# Altium PCB PCB1.PcbDoc
Units mil, origin at the board's own origin, x right, y up, seen from the top; angles counter-clockwise.
Board outline 6000 x 4000 mil, 2 copper layers (Top Layer, Bottom Layer); 88 components, 63 nets, 285 pads, 2 vias.
Unrouted connection lines stored in the file: 200.
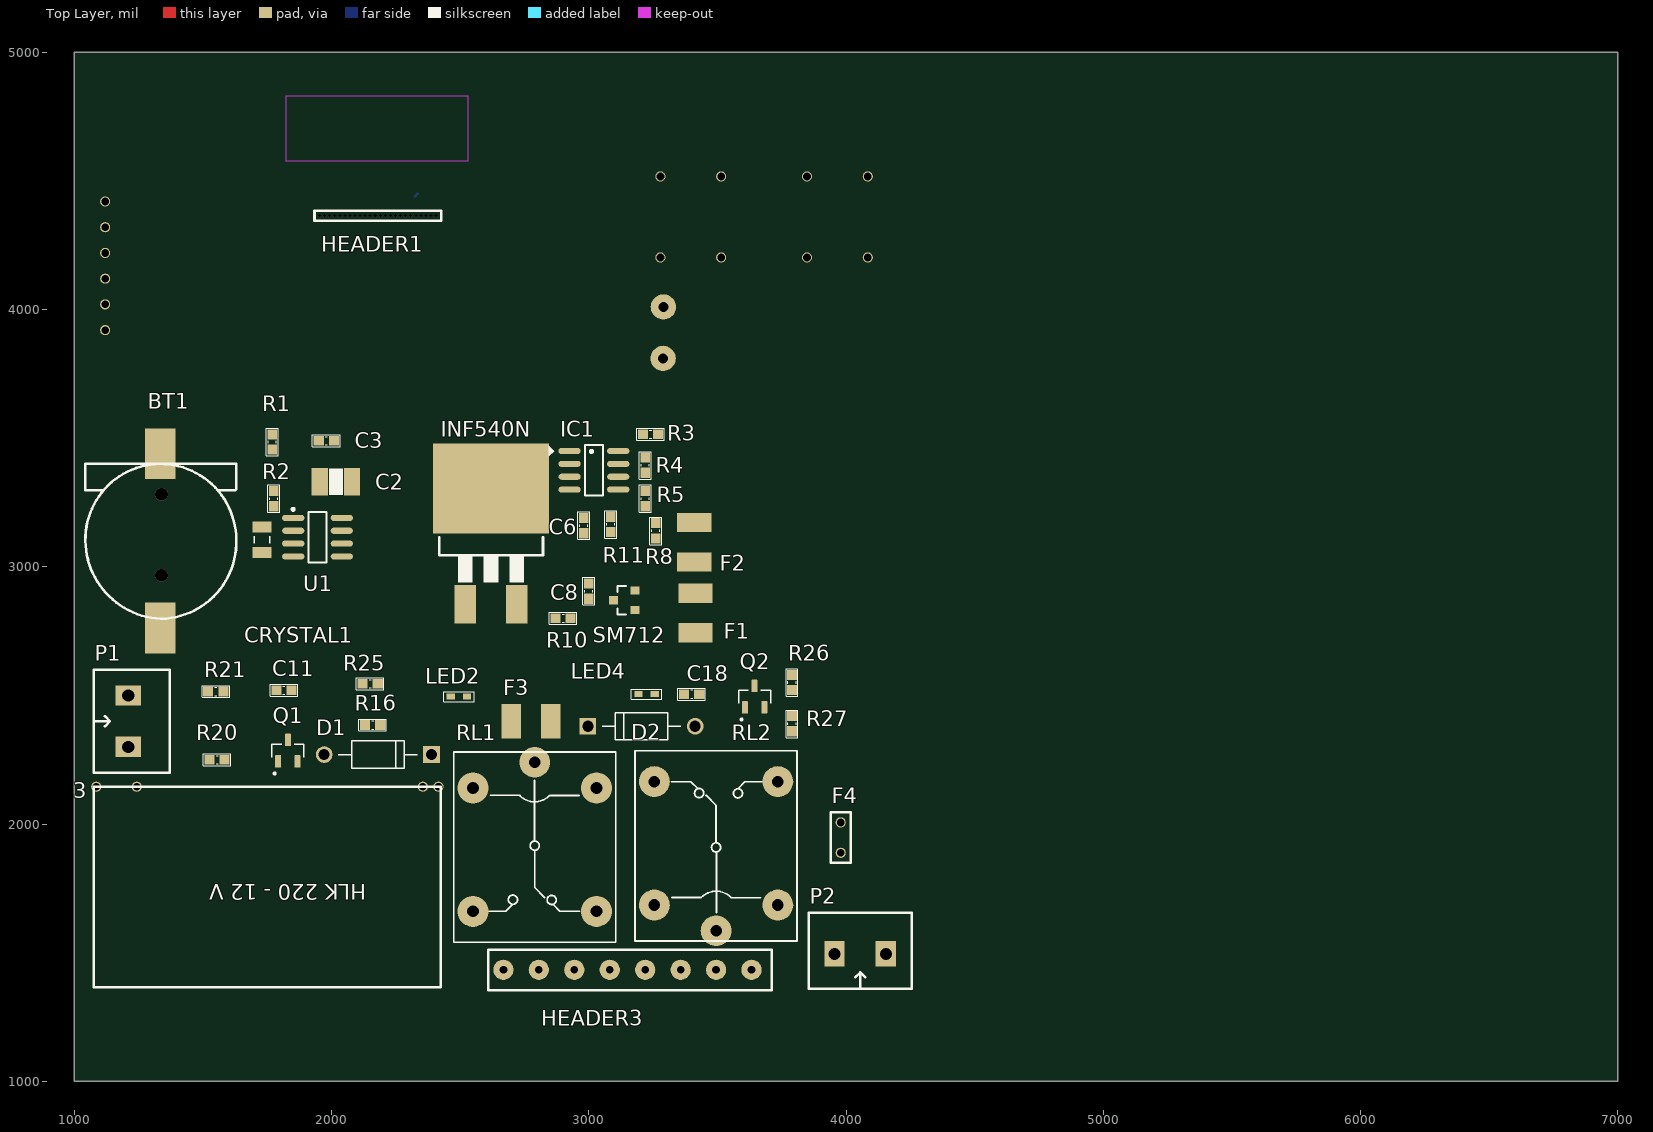
[diagram p0: Top Layer view]
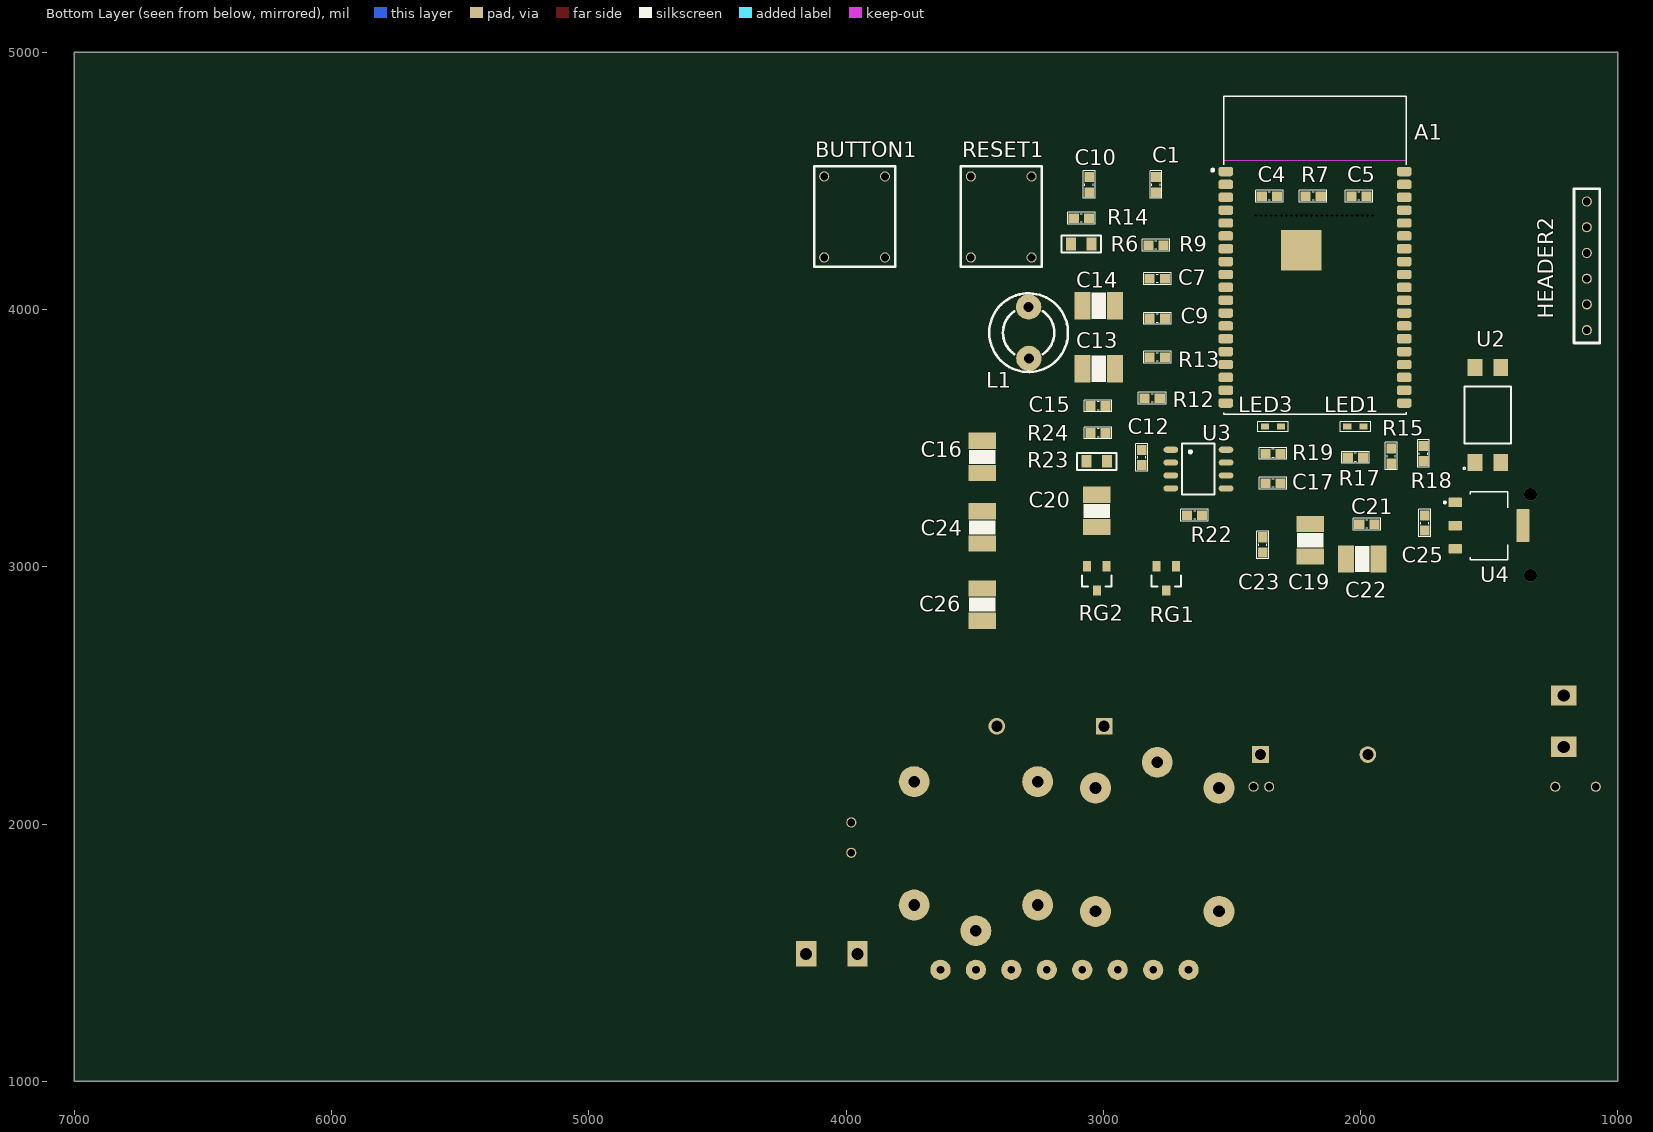
[diagram p1: Bottom Layer view, seen from below]

## Layer stack, top to bottom
Top Solder: solder mask 0.4, Solder Resist, Dk 3.5
Top Layer: signal copper 1.4
Dielectric 1: dielectric 12.6, FR-4, Dk 4.8
Bottom Layer: signal copper 1.4
Bottom Solder: solder mask 0.4, Solder Resist, Dk 3.5

## Board outline
1000,1000 7000,1000 7000,5000 1000,5000

## Design rules (kind name [scope] priority, off if disabled: settings)
Clearance [All] p1: gap=15
PolygonConnect [All] p1: connectstyle=Relief reliefconductorwidth=10 reliefentries=4 polygonreliefangle="90 Angle" airgapwidth=10
RoomDefinition Sheet1 [InComponentClass('Sheet1')] p1: confinementstyle=ConfineIn formatcopy=TRUE lockcomponents=FALSE outline 0,0 2000,0 2000,1000 0,1000
RoutingVias [All] p1: holewidth=28 width=50 viastyle="Through Hole" minholewidth=28 minwidth=50 maxholewidth=28 maxwidth=50
SolderMaskExpansion [All] p1: expansion=4
Width [All] p1: maxlimit=10 minlimit=10 preferedwidth=10
30 further rules are at their usual default settings.

## Components (designator, comment, footprint, x,y, rotation, side; value= is the part's Value field where it differs from the comment)
3 "HLK-220V-12V" "HLK 220-12" 475,2345 r90 top
A1 "ESP32-WROVER-I" XCVR_ESP32-WROVER-I 2176.81,4211.06 r180 bottom
BT1 "MH004292" "DE PINCR1220" 1630,3400 r180 top
BUTTON1 "SW-2P-S" BUTTON_4_PIN 4065,4360 r270 bottom
C1 "0.1uF" "Tu 0603" 2795,4485 r90 bottom
C2 "10uF" C1210 2025,3330 r0 top
C3 "100nF" "Tu 0603" 1980,3490 r180 top
C4 "15pF" "Tu 0603" 2354,4440 r0 bottom
C5 "0.1uF" "Tu 0603" 2006,4440 r180 bottom
C6 "100nF" "Tu 0603" 2980,3160 r270 top
C7 "0.1uF" "Tu 0603" 2790,4120 r180 bottom
C8 "1nF" "Tu 0603" 3000,2905 r90 top
C9 "0.1uF" "Tu 0603" 2790,3965 r180 bottom
C10 "0.1uF" "Tu 0603" 3055,4485 r90 bottom
C11 "100nF" "Tu 0603" 1815,2520 r0 top
C12 "100nF" "Tu 0603" 2850,3425 r270 bottom
C13 "10uF" C1210 3025,3770 r0 bottom
C14 "10uF" C1210 3025,4015 r0 bottom
C15 "100nF" "Tu 0603" 3020,3625 r0 bottom
C16 "47uF" C1210 3470,3435 r90 bottom
C17 "100nF" "Tu 0603" 2340,3325 r180 bottom
C18 "100nF" "Tu 0603" 3400,2505 r180 top
C19 "10uF" C1210 2195,3095 r270 bottom
C20 "10uF" C1210 3025,3225 r90 bottom
C21 "0.1uF" "Tu 0603" 1975,3165 r180 bottom
C22 "10uF" C1210 1985,3030 r180 bottom
C23 "100nF" "Tu 0603" 2380,3085 r90 bottom
C24 "10uF" C1210 3470,3145 r270 bottom
C25 "0.1uF" "Tu 0603" 1750,3170 r90 bottom
C26 "10uF" C1210 3470,2845 r270 bottom
CRYSTAL1 "32.768kHZ" XTAL_ABS07-32.768KHZ-T 1730,3105 r90 top
D1 "1N4007" DIOAD1060W80L520D270 2180,2270 r180 top
D2 "1N4007" DIOAD1060W80L520D270 3205,2380 r0 top
F1 "PTC 750 mA" 1812 3415,2820 r270 top
F2 "PTC 750 mA" 1812 3410,3095 r90 top
F3 "PTC 1A" 1812 2775,2400 r0 top
F4 "10A/250V" FUSE_10A 3940,1770 r270 top
HEADER1 "OV2640_CAMERA_CONNECTION" OV2640_0.5mm 2170,4660 r90 top
HEADER2 "CONG_NAP" CONG_NAP 1320,4120 r0 bottom
HEADER3 "CAT6" CAT6_3.5mm 2865,1630 r90 top
IC1 "MAX485" SO-8 3020,3375 r0 top
INF540N "IRF540N" D2PACK 2620,3205 r0 top (schematic designator 1)
L1 "15uH/3A" "CUON CAM 200mil" 3290,3910 r270 bottom
LED1 "" "LED_SMD_0603 - duplicate1" 2020,3545 r180 bottom
LED2 "" "LED_SMD_0603 - duplicate1" 2495,2495 r0 top
LED3 "" "LED_SMD_0603 - duplicate1" 2340,3545 r180 bottom
LED4 "" "LED_SMD_0603 - duplicate1" 3225,2505 r0 top
P1 "INPUT_220VAC" "Medium - Header 2" 1210,2400 r90 top
P2 "OUTPUT_220VAC" "Medium - Header 2" 4055,1495 r180 top
Q1 "BSS138" SOT95P240X111-3N 1830,2285 r90 top
Q2 "BSS138" SOT95P240X111-3N 3645,2495 r90 top
R1 "RES_08" "TRO SMD 0603" 1770,3485 r270 top
R2 "RES_08" "TRO SMD 0603" 1775,3265 r270 top
R3 "RES_08" "TRO SMD 0603" 3240,3515 r180 top
R4 "RES_08" "TRO SMD 0603" 3220,3395 r270 top
R5 "RES_08" "TRO SMD 0603" 3220,3265 r90 top
R6 "RES_08" "DIEN TRO 0805" 3085,4255 r0 bottom
R7 "RES_08" "TRO SMD 0603" 2184,4440 r0 bottom
R8 "RES_08" "TRO SMD 0603" 3260,3140 r270 top
R9 "RES_08" "TRO SMD 0603" 2795,4250 r0 bottom
R10 "RES_08" "TRO SMD 0603" 2900,2800 r0 top
R11 "RES_08" "TRO SMD 0603" 3085,3165 r270 top
R12 "RES_08" "TRO SMD 0603" 2810,3655 r180 bottom
R13 "RES_08" "TRO SMD 0603" 2790,3815 r180 bottom
R14 "RES_08" "TRO SMD 0603" 3085,4355 r180 bottom
R15 "RES_08" "TRO SMD 0603" 1880,3430 r90 bottom
R16 "RES_08" "TRO SMD 0603" 2160,2385 r180 top
R17 "RES_08" "TRO SMD 0603" 2020,3425 r180 bottom
R18 "RES_08" "TRO SMD 0603" 1755,3440 r270 bottom
R19 "RES_08" "TRO SMD 0603" 2340,3440 r180 bottom
R20 "RES_08" "TRO SMD 0603" 1555,2250 r180 top
R21 "RES_08" "TRO SMD 0603" 1550,2515 r0 top
R22 "RES_08" "TRO SMD 0603" 2645,3200 r0 bottom
R23 "RES_08" "DIEN TRO 0805" 3025,3410 r180 bottom
R24 "RES_08" "TRO SMD 0603" 3020,3520 r180 bottom
R25 "RES_08" "TRO SMD 0603" 2150,2545 r180 top
R26 "RES_08" "TRO SMD 0603" 3790,2550 r270 top
R27 "RES_08" "TRO SMD 0603" 3790,2390 r270 top
RESET1 "SW-2P-S" BUTTON_4_PIN 3495,4360 r270 bottom
RG1 "Reg_Torex_XC6206P332MR_eec" Torex_https--www.torexsemi.com-file-SOT-23-SOT-23-pkg.pdf_0 2755,2955 r270 bottom
RG2 "Reg_Torex_XC6206P332MR_eec" Torex_https--www.torexsemi.com-file-SOT-23-SOT-23-pkg.pdf_0 3025,2955 r270 bottom
RL1 "Relay 1A/12V" RL_SPDT_10A 2790,2240 r270 top
RL2 "Relay 1A/12V" RL_SPDT_10A 3495,1585 r90 top
SM712 "SM712" SOT23-3 3140,2870 r90 top (schematic designator 2)
U1 "DS1307" SOIC8 1851.02,3190 r270 top
U2 "OPTO" SOIC254P1016X390-4N 1505,3590 r90 bottom
U3 "FR9888" FR9888_SMD 2630,3380 r180 bottom
U4 "AMS1117-3.3" SOT229P700X180-4N 1500,3160 r270 bottom

## Footprints (in the part's own frame and the unit in brackets; to place one, negate y for a bottom-side part, rotate by r counter-clockwise, add the part's x,y. Pads: shape width x height; smd on the part's side, far side on the other; paste and mask are expansions set on the pad)
1812 [mm]
  rect 1.9x3.4 smd: 1(-1.95,0) 2(1.95,0)
BUTTON_4_PIN [mm] "BUTTON_4_PIN"
  round 1 hole 0.762: 1(-4,5.5) 2(4,5.5) ""(-4,-0.5) ""(4,-0.5)
  silkscreen extent -5,-1.5 4.9,6.5
C1210 [mm] "Chip Capacitor; Body 3.2 x 2.5 mm (LxW typ)"
  rect 1.6x2.7 smd: 1(1.4,0) 2(-1.8,0)
  silkscreen extent -0.9,-1.3 0.5,1.3, body extent -2.3,-1.35 1.9,1.35
CAT6_3.5mm [mm]
  round 2 hole 0.762: 1(-5,5) 2(-5,1.5) 3(-5,-2) 4(-5,-5.5) 5(-5,-9) 6(-5,-12.5) 7(-5,-16) 8(-5,-19.5)
  silkscreen extent -7,-21.5 -3,6.5
CONG_NAP [mm] "CONG_NAP_6_PIN"
  round 1 hole 0.762: 1(-5.08,5.08) 2(-5.08,2.54) 3(-5.08,0) 4(-5.08,-2.54) 5(-5.08,-5.08) 6(-5.08,-7.62)
  silkscreen extent -6.35,-8.89 -3.81,6.35
"CUON CAM 200mil" [mm]
  round 2.5 hole 1: 1(-2.54,0) 2(2.54,0.025)
  silkscreen extent -3.89,-3.89 3.89,3.88
D2PACK [mil]
  rect 82x150 smd: 1(-100,-350) 3(100,-350)
  rect 450x350 smd: 2(0,100)
  silkscreen extent -202,-266 202,-91
"DE PINCR1220" [mm]
  rect 3x5 smd: 1(7.5,-1) 2(7.5,16.2)
  silkscreen extent 0,0 14.9,15.3, body extent 0.04,-2.82 14.79,15.98, height 4.76
"DIEN TRO 0805" [mil] "Chip Resistor; Body 2.0 x 1.3 mm (LxW typ)"
  rect 39.37x50 smd: 1(-40,0) 2(40,0)
  silkscreen extent -77,-33 77,33, body extent -39,-25 39,25, height 31
DIOAD1060W80L520D270 [mm]
  round 1.65 hole 1.1: A(5.3,0)
  rect 1.65x1.65 hole 1.1: C(-5.3,0)
  silkscreen extent -3.9,-1.35 3.9,1.35
FR9888_SMD [mm] "FR9888_SMD_SOP8"
  oval 1.45x0.6 smd: 1(-2.725,1.905) 2(-2.725,0.635) 3(-2.725,-0.635) 4(-2.725,-1.905) 5(2.725,-1.905) 6(2.725,-0.635) 7(2.725,0.635) 8(2.725,1.905)
  silkscreen extent -1.6,-2.5 1.6,2.5, body extent -2,-2.5 2,2.5, height 1.7
FUSE_10A [mm] "FUSE_1A"
  round 1 hole 0.762: 1(-6,1) 2(-3,1)
  silkscreen extent -7,0 -2,2
"HLK 220-12" [mm] "HLK 220 - 12V Footprint"
  round 1 hole 0.762: 1(-5.08,-15.5) 2(-5.08,-19.5) 3(-5.08,-49.29) 4(-5.08,-47.752)
  silkscreen extent -24.89,-49.53 -5.08,-15.24
"LED_SMD_0603 - duplicate1" [mm] "LED_SMD_0603"
  rect 0.8x0.6 smd: 1(-0.8,0) 2(0.8,0)
  silkscreen extent -1.5,-0.5 1.5,0.5
"Medium - Header 2" [mm]
  rect 2x2.5 hole 1.2: 1(-2.54,0) 2(2.54,0)
  silkscreen extent -5.08,-4.08 5.08,3.43, body extent -5,-4.07 5,3.43, height 10
OV2640_0.5mm [mm] "camera 0v2640 0.5mm"
  oval 0.3x0 hole 0.3: 1(-7.5,5.5) 2(-7.5,5) 3(-7.5,4.5) 4(-7.5,4) 5(-7.5,3.5) 6(-7.5,3) 7(-7.5,2.5) 8(-7.5,2) 9(-7.5,1.5) 10(-7.5,1) 11(-7.5,0.5) 12(-7.5,0) 13(-7.5,-0.5) 14(-7.5,-1) 15(-7.5,-1.5) 16(-7.5,-2) 17(-7.5,-2.5) 18(-7.5,-3) 19(-7.5,-3.5) 20(-7.5,-4) 21(-7.5,-4.5) 22(-7.5,-5) 23(-7.5,-5.5) 24(-7.5,-6)
  silkscreen extent -8,-6.5 -7,6
RL_SPDT_10A [mil] "Relay SPDT, 5 pin, 10A,W 650mil, L 800mil, H 800mil"
  round 120 hole 45: 1(0,0) 2(580,240) 3(580,-240) 4(100,-240) 5(100,240)
  silkscreen extent -40,-315 700,315, body extent -46,-304 706,306, height 602
SO-8 [mm] "8-Pin Small Outline Integrated Circuit 1.27 mm Pitch, IPC Medium Density"
  oval 2.2x0.6 smd: 1(-2.4,1.905) 2(-2.4,0.635) 3(-2.4,-0.635) 4(-2.4,-1.905) 5(2.4,-1.905) 6(2.4,-0.635) 7(2.4,0.635) 8(2.4,1.905)
  silkscreen extent -4.44,-2.5 0.9,2.5, body extent -2.93,-2.51 3.08,2.49, height 1.75
SOIC8 [mm] "SOIC, 8-Leads, Body 4.9x3.9mm, Pitch 1.27mm, IPC Medium Density"
  oval 0.6x2.2 smd: 1(0,0) 2(1.27,0) 3(2.54,0) 4(3.81,0) 5(3.81,4.8) 6(2.54,4.8) 7(1.27,4.8) 8(0,4.8)
  silkscreen extent -0.97,-0.12 4.41,3.3, body extent -0.55,0.45 4.36,4.35, height 1.75
SOIC254P1016X390-4N [mm]
  rect 1.7x1.45 smd: 1(-4.7,1.27) 2(-4.7,-1.27) 3(4.7,-1.27) 4(4.7,1.27)
  silkscreen extent -5.37,-2.29 2.8,2.43
SOT23-3 [mm]
  rect 0.8x0.9 smd: 1(-0.95,-1) 2(0.95,-1) 3(0,1.1)
  silkscreen extent -1.4,-0.1 1.4,0.7
SOT95P240X111-3N [mm]
  rrect25% 1.23x0.6 smd: 1(-1.06,0.95) 2(-1.06,-0.95) 3(1.06,0)
  silkscreen extent -2.35,-1.57 0.65,1.57
SOT229P700X180-4N [mm]
  rrect15% 0.93x1.31 smd: 1(-2.29,-3.345) 2(0,-3.345) 3(2.29,-3.345)
  rrect15% 3.24x1.31 smd: 4(0,3.345)
  silkscreen extent -3.36,-4.47 3.36,1.86
Torex_https--www.torexsemi.com-file-SOT-23-SOT-23-pkg.pdf_0 [mm]
  rect 1x0.8 smd paste+0 mask+0: 1(-1.2,0.95) 2(-1.2,-0.95) 3(1.2,0)
  silkscreen extent -0.3,-1.45 0.8,1.45, body extent -1.4,-1.45 1.4,1.45, height 1.2
"TRO SMD 0603" [mm] "Chip Capacitor, 2-Leads, Body 1,60x0,80mm, IPC Medium Density"
  rect 1x0.95 smd mask+0.076: 1(-0.75,0) 2(0.75,0)
  silkscreen extent -1.35,-0.58 1.37,0.58, body extent -0.82,-0.42 0.82,0.43, height 0.44
"Tu 0603" [mm] "Chip Capacitor, 2-Leads, Body 1,60x0,80mm, IPC Medium Density"
  rect 1x0.95 smd mask+0.076: 1(-0.75,0) 2(0.75,0)
  silkscreen extent -1.35,-0.58 1.37,0.58, body extent -0.8,-0.4 0.8,0.4, height 0.9
XCVR_ESP32-WROVER-I [mm]
  rrect50% 1.45x0.93 smd: 1(-8.81,8.26) 2(-8.81,6.99) 3(-8.81,5.72) 4(-8.81,4.45) 5(-8.81,3.18) 6(-8.81,1.91) 7(-8.81,0.64) 8(-8.81,-0.63) 9(-8.81,-1.9) 10(-8.81,-3.17) 11(-8.81,-4.44) 12(-8.81,-5.71) 13(-8.81,-6.98) 14(-8.81,-8.25) 15(-8.81,-9.52) 16(-8.81,-10.79) 17(-8.81,-12.06) 18(-8.81,-13.33) 19(-8.81,-14.6) 20(8.81,-14.6) 21(8.81,-13.33) 22(8.81,-12.06) 23(8.81,-10.79) 24(8.81,-9.52) 25(8.81,-8.25) 26(8.81,-6.98) 27(8.81,-5.71) 28(8.81,-4.44) 29(8.81,-3.17) 30(8.81,-1.9) 31(8.81,-0.63) 32(8.81,0.64) 33(8.81,1.91) 34(8.81,3.18) 35(8.81,4.45) 36(8.81,5.72) 37(8.81,6.99) 38(8.81,8.26)
  rect 4x4 smd paste-3: 39(-1.38,0.47)
  Keep-Out Layer region: 9,9.33 -9.029,9.33 -9.029,15.7 9,15.7
  Keep-Out Layer region: 9,9.331 -9.03,9.331 -9.03,15.7 9,15.7
  Keep-Out Layer region: 9,9.324 -9.023,9.324 -9.023,15.7 9,15.7
  silkscreen extent -10.22,-15.7 9,15.7
XTAL_ABS07-32.768KHZ-T [mm]
  rect 1.1x1.9 smd: 1(-1.25,0) 2(1.25,0)
  silkscreen extent -0.35,-0.75 0.35,0.75

## Part data
3: library part HLK-PM01
A1: "Bluetooth, WiFi 802.11b/g/n, Bluetooth v4.2 + EDR, Class 1, 2 and 3 Transceiver Module 2.4GHz ~ 2.5GHz Antenna Not Included, I-PEX Surface Mount"
BT1: library part "De Pin 3.3V", "Dán"
BUTTON1 RESET1: library part SW-2PIN-SMALL, "Switch Small 2 Pin"
C1 C2 C3 C4 C5 C6 C7 C8 C9 C10 C11 C12 C13 C14 C15 C16 C17 C19 C20 C21 C22 C23 C24 C25 C26: library part Capacitor, "Capacitor"
C18: library part "Cap SMD 1206"
CRYSTAL1: library part ABS07-32.768KHZ-T, "32.768kHz ±20ppm Crystal 12.5pF 70 kOhms 2-SMD, No Lead"
D1 D2: "Diode Standard 1000V 1A Through Hole DO-204AL _DO-41_"
F1 F2 F3: library part 1812L075PR, "Polymeric PTC Resettable Fuse 13.2V 750mA Ih Surface Mount 1812 _4532 Metric_, Concave"
F4: library part "Fuse 1", "Fuse"
HEADER1: library part OV2640_CAMERA, "OV2640_CAMERA"
HEADER2: library part HEADER_6
IC1: "RS232 - RS485 (Same sn75176)"
INF540N: "N-Channel 100V 33A _Tc_ 130W _Tc_ Surface Mount D2PAK"
L1: library part Conductor
LED1 LED2 LED3 LED4: library part "LED 5mm", "LED 5mm"
P1 P2: library part "Header 2 - M", "Header, 2-Pin, Medium"
Q1 Q2: "N-Channel 50V 220mA (Ta) 360mW (Ta) Surface Mount SOT-23-3"
RL1 RL2: library part "Relay 1", "Relay SPDT,10A - 12VDC 5 Pin"
SM712: library part CDSOT23-SM712, "26V, 14V Clamp 17A _8/20µs_ Ipp Tvs Diode Surface Mount SOT-23-3"
U1: "Realtime Clock IC"
U2: library part SFH615A-3X009T, "Optoisolator Transistor Output 5300Vrms 1 Channel 4-SMD"
U4: "Sot223/Pkg 1-Amp 3.3-Volt Low Drop Out Voltage Regulatator"

## Via types
v1: diameter 50, hole 50, Top Layer to Bottom Layer, 2 vias

## Nets (pads, with @x,y where several pads share a name; then routed paths per layer and width w, separated by ;. In a path a pad name is that pad's centre, name@x,y a point inside that pad or via, vN(x,y) a via of type N, cw(c..) or ccw(c..) an arc to the next point about the centre after c; other vN are vias at no path point)
3.3V: A1.2 C1.1 C5.2 C6.1 C19.1 C23.1 C26.1 HEADER1.14 HEADER2.1 IC1.8 R1.1 R2.1 R3.1 R4.1 R6.1 R9.1 R11.2 R12.1 R13.1 R14.2 R15.1 R17.2 R19.2 RG1.3 RG2.3 U4.2
5V: C2.1 C3.1 C16.1 C22.1 L1.2 R23.1 U1.8 U4.3
220V_L: 3.1 P1.2 RL2.1
220V_N: 3.2 P1.1 P2.2
+12V: 3.4 C11.1 C13.1 C14.1 C15.2 C18.2 D1.C D2.C HEADER3.1 HEADER3.2 R16.2 R22.2 R25.2 RL1.1 RL1.5 RL2.5 U3.2
BT: A1.25 BUTTON1.1 C9.1 HEADER2.5 R6.2
CAM_D0: A1.26 HEADER1.6
CAM_D1: A1.29 HEADER1.4
CAM_D2: A1.30 HEADER1.3
CAM_D3: A1.31 HEADER1.5
CAM_D4: A1.4 HEADER1.7
CAM_D5: A1.5 HEADER1.9
CAM_D6: A1.6 HEADER1.11
CAM_D7: A1.7 HEADER1.13
CAM_HREF: A1.37 HEADER1.16
CAM_PCLK: A1.36 C4.2 HEADER1.8
CAM_RST: C7.1 HEADER1.19 R9.2
CAM_SCL: A1.12 HEADER1.20 R12.2
CAM_SDA: A1.11 HEADER1.22 R13.2
CAM_VSYNC: A1.10 HEADER1.18
CAM_XCLK: A1.33 HEADER1.12
CSI_1.2V: C24.1 C25.1 HEADER1.15 RG2.2
CSI_2.8V: C20.1 C21.1 HEADER1.21 RG1.2
"E32 RST": A1.3 C10.1 HEADER2.6 R14.1 RESET1.2
ESP32_RX: A1.34 HEADER2.4 LED1.2
ESP32_TX: A1.35 HEADER2.3
GND: 3.3 A1.1 A1.15 A1.38 BT1.2 BUTTON1.2 C1.2 C2.2 C3.2 C4.1 C5.1 C6.2 C7.2 C8.2 C9.2 C10.2 C13.2 C14.2 C15.1 C16.2 C17.2 C19.2 C20.2 C21.2 C22.2 C23.2 C24.2 C25.2 C26.2 HEADER1.10 HEADER1.23 HEADER2.2 HEADER3.3 HEADER3.4 IC1.4 IC1.5 INF540N.3 LED3.2 Q1.2 Q2.2 R5.1 R7.2 R21.2 R24.2 R27.2 RESET1.1 RG1.1 RG2.1 SM712.3 U1.4 U2.2 U2.3 U3.4 U4.1 | length 14.9
  Bottom Layer w10: C4.1 C4.1@2335,4450.53
IN_DIGITAL: A1.24 R15.2 U2.4
INPUT_DIGITAL: HEADER3.8 R18.2
MOTOR: F3.2 HEADER3.7
Net1_1: C8.1 INF540N.1 R10.2
Net1_2: IC1.2 IC1.3 INF540N.2 R3.2
Net2_1: F2.1 IC1.6 R8.2 R11.1 SM712.1
Net2_2: F1.1 IC1.7 R5.2 R8.1 SM712.2
NetBT1_1: BT1.1 U1.3
NetC11_2: C11.2 D1.A LED2.2 Q1.3 RL1.4
NetC12_1: C12.1 U3.1
NetC12_2: C12.2 L1.1 U3.3
NetC17_1: C17.1 U3.8
NetC18_1: C18.1 D2.A LED4.2 Q2.3 RL2.4
NetCRYSTAL1_1: CRYSTAL1.1 U1.2
NetCRYSTAL1_2: CRYSTAL1.2 U1.1
NetF3_1: F3.1 RL1.3
NetF4_1: F4.1 RL2.3
NetF4_2: F4.2 P2.1
NetHEADER1_17: HEADER1.17 R7.1
NetLED1_1: LED1.1 R17.1
NetLED2_1: LED2.1 R16.1
NetLED3_1: LED3.1 R19.1
NetLED4_1: LED4.1 R25.1
NetQ1_1: Q1.1 R20.2 R21.1
NetQ2_1: Q2.1 R26.2 R27.1
NetR18_1: R18.1 U2.1
NetR22_1: R22.1 U3.7
NetR23_2: R23.2 R24.1 U3.5
RL_220: A1.23 R26.1
RL_M: A1.13 R20.1
"RS485 A": F2.2 HEADER3.5
"RS485 B": F1.2 HEADER3.6
RS485_RX: A1.14 IC1.1 R4.2
RS485_TX: A1.16 R10.1
RTC_SCL: A1.9 R1.2 U1.6
RTC_SDA: A1.8 R2.2 U1.5
pads on no net: A1.17 A1.18 A1.19 A1.20 A1.21 A1.22 A1.27 A1.28 A1.32 A1.39 BUTTON1. HEADER1.1 HEADER1.2 HEADER1.24 RESET1. RL1.2 RL2.2 U1.7 U3.6 U4.4
copper on no net:
  other v1: 1338.66,2966.93 1338.66,3281.89

## Text inside footprints (layer, text, board x,y; h text height)
3: Top Overlay "HLK 220 - 12 V" at 2135,1765 h60 r180